# Altium PCB MiniClock.PcbDoc
Units mil, origin at the board's own origin, x right, y up, seen from the top; angles counter-clockwise.
Board outline 3937.01 x 1125.98 mil, 4 copper layers (Top Layer, Internal Plane 1, Internal Plane 2, Bottom Layer), stack 18.2 mil thick; 63 components, 85 nets, 292 pads, 146 vias.
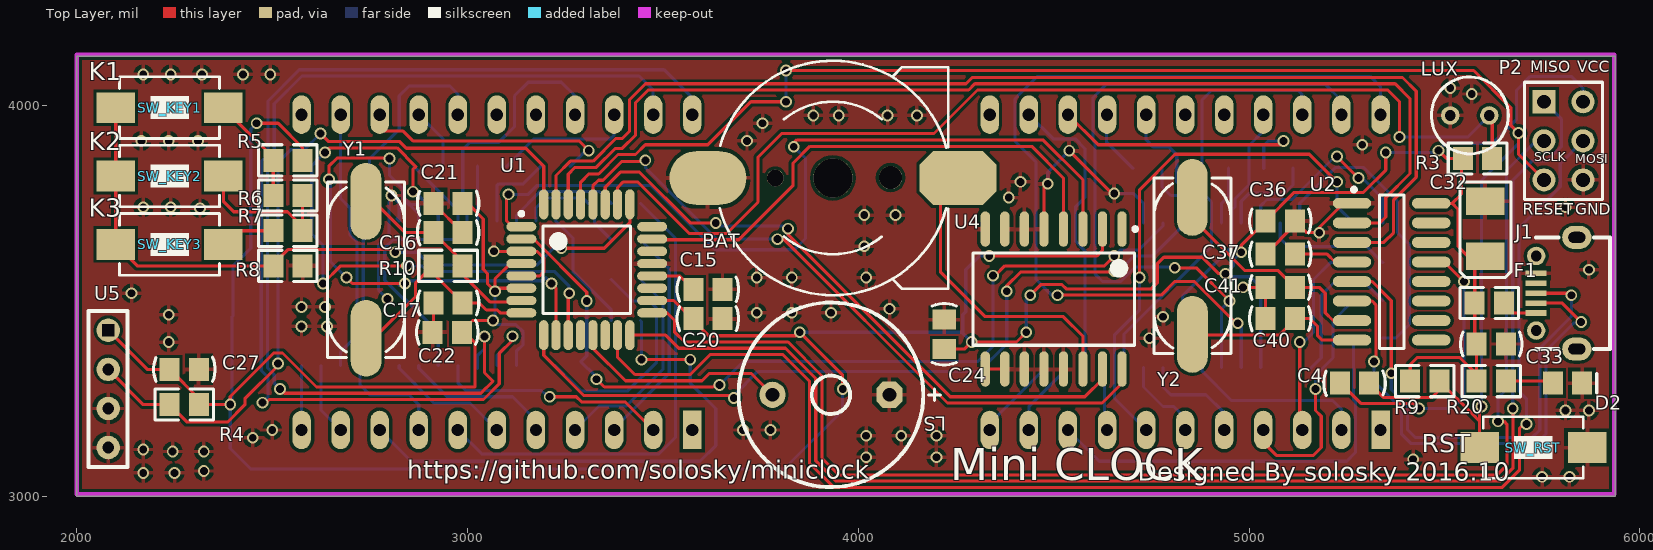
[diagram p0: Top Layer view]
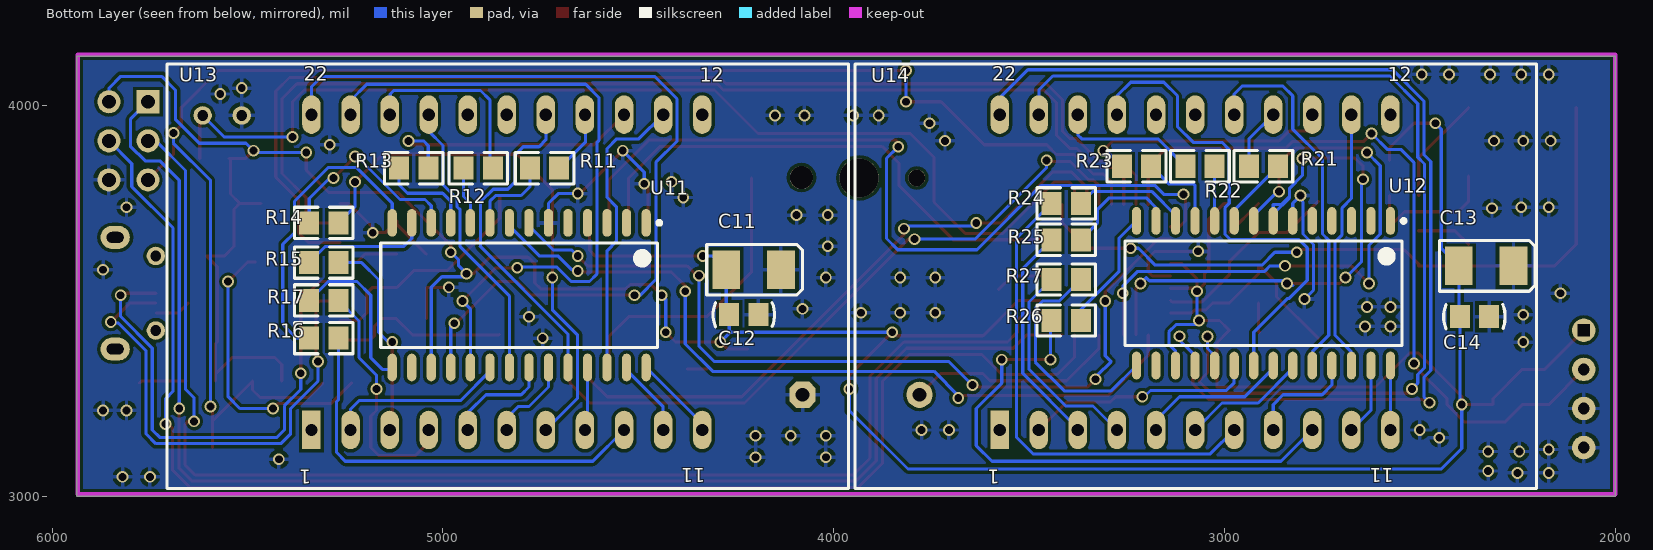
[diagram p1: Bottom Layer view, seen from below]
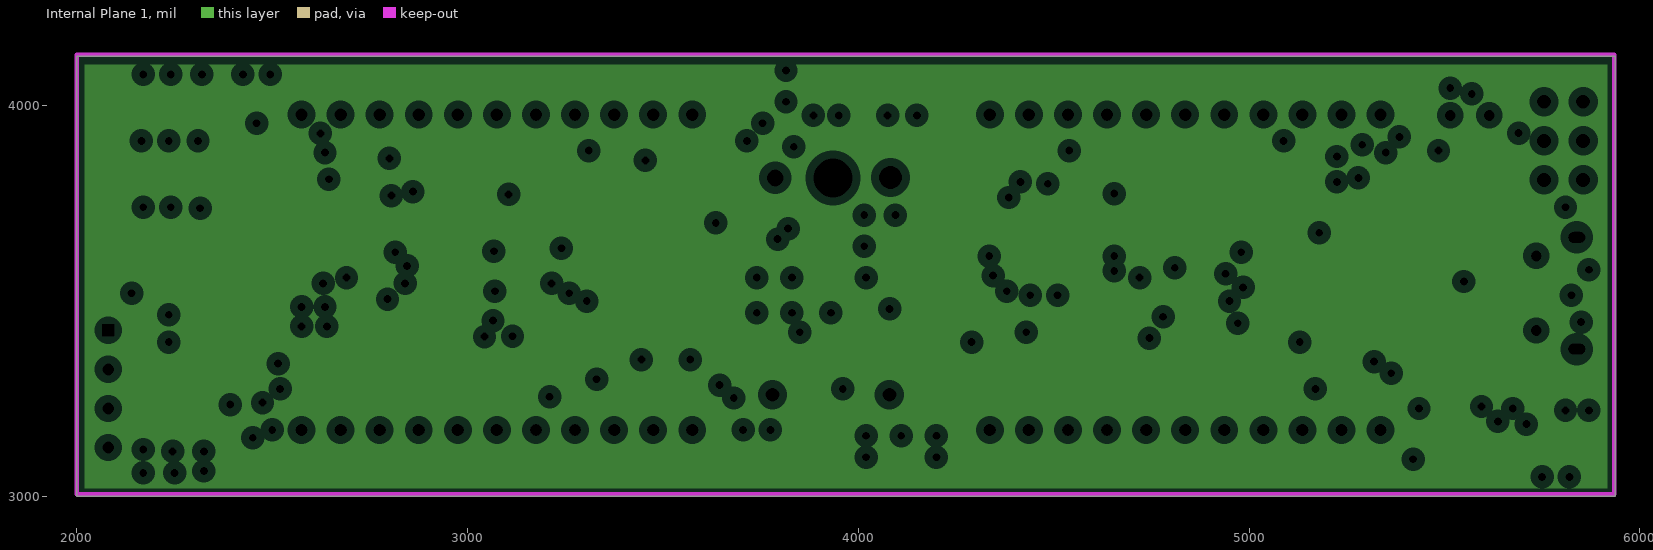
[diagram p2: Internal Plane 1, clearances drawn from the general rule]
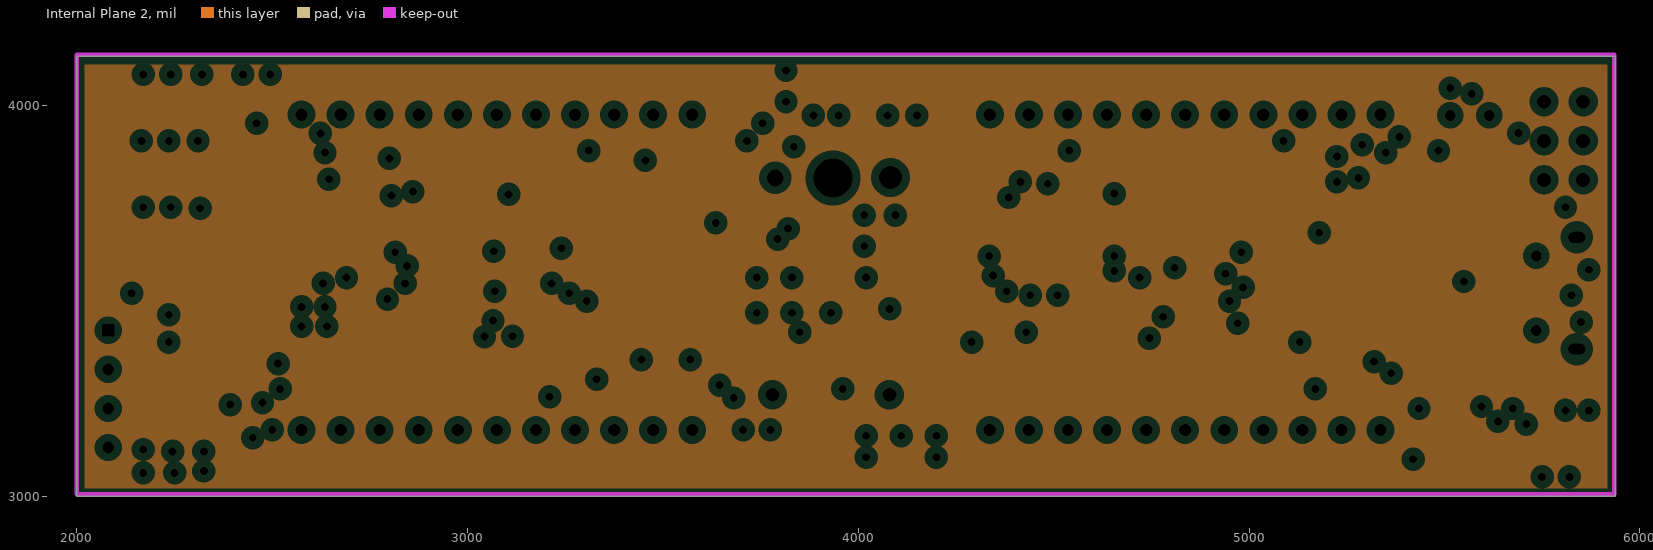
[diagram p3: Internal Plane 2, clearances drawn from the general rule]
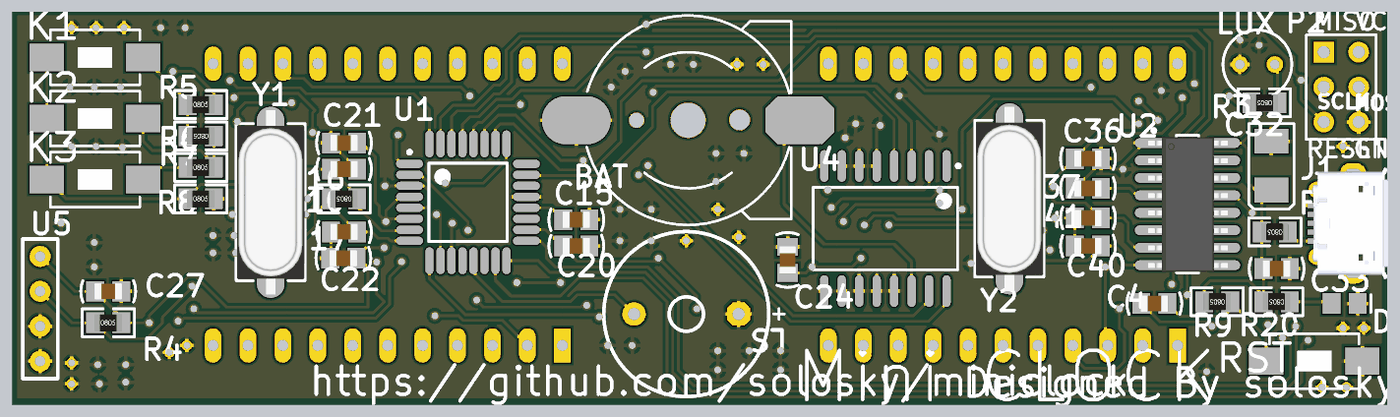
[diagram p4: 3D render of the assembled board from above, using the file's embedded part models]
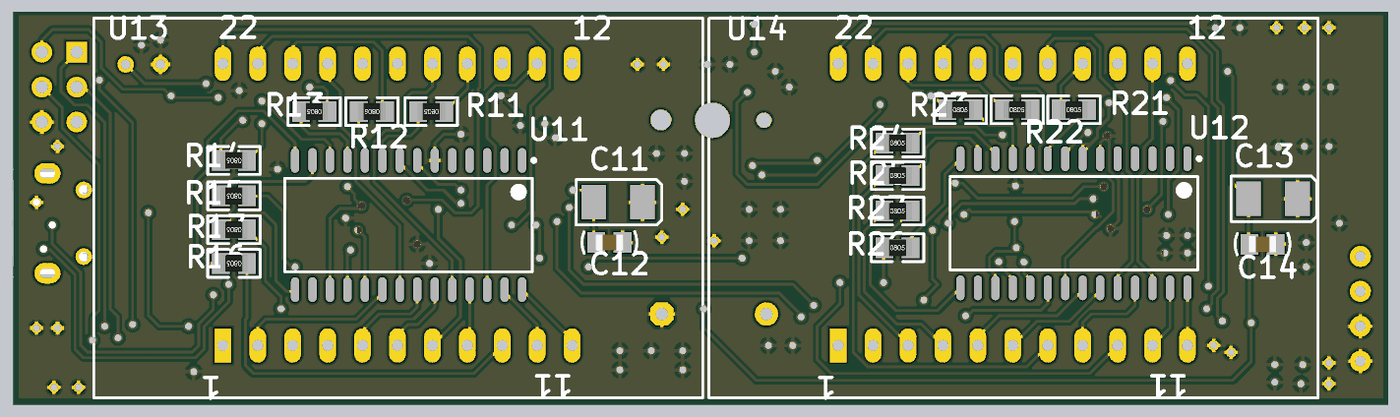
[diagram p5: 3D render of the assembled board from below, using the file's embedded part models]

## Layer stack, top to bottom
Top Solder: solder mask 0.4, Solder Resist, Dk 3.5
Top Layer: signal copper 1.4
Internal Plane 1: plane copper 1.4
Internal Plane 2: plane copper 1.4
Dielectric 1: dielectric 12.6, FR-4, Dk 4.8
Bottom Layer: signal copper 1.4
Bottom Solder: solder mask 0.4, Solder Resist, Dk 3.5

## Board outline
2000,3000 5937.01,3000 5937.01,4125.98 2000,4125.98

## Design rules (kind name [scope] priority, off if disabled: settings)
Clearance [All] p1: gap=8 except(6: SMDPad-SMDPad)
MinimumSolderMaskSliver [All] p1: minsoldermaskwidth=4
PlaneClearance [All] p1: clearance=20
PlaneConnect [All] p1: planeconnectstyle=Relief reliefexpansion=20 reliefentries=4 reliefconductorwidth=10 reliefairgap=10
PolygonConnect [All] p1: connectstyle=Relief reliefconductorwidth=10 reliefentries=4 polygonreliefangle="90 Angle" airgapwidth=10
RoutingVias [All] p1: holewidth=20 width=30 viastyle="Through Hole" minholewidth=20 minwidth=30 maxholewidth=20 maxwidth=30
SilkToSilkClearance [All] p1: silktosilkclearance=6
SilkToSolderMaskClearance [IsPad] p1: minsilkscreentomaskgap=4 clearancetoexposedcopper=TRUE
SolderMaskExpansion [All] p1: expansion=4
UnpouredPolygon [All] p1: allowunpoured=FALSE
Width [All] p1: maxlimit=8 minlimit=8 preferedwidth=8
24 further rules are at their usual default settings.

## Classes and differential pairs
component class MiniClock: BAT C4 C15 C16 C17 C20 C21 C22 C24 C27 C32 C33 C36 C37 C40 C41 D2 F1 J1 LS LUX P2 R3 R4 R5 R6 R7 R8 R9 R10 R20 SW_KEY1 SW_KEY2 SW_KEY3 SW_RST U1 U2 U4 U5 Y1 Y2
component class LedDriver: C11 C12 C13 C14 R11 R12 R13 R14 R15 R16 R17 R21 R22 R23 R24 R25 R26 R27 U11 U12 U13 U14

## Components (designator, comment, footprint, x,y, rotation, side; value= is the part's Value field where it differs from the comment)
BAT "CR1220" CR1220 3935,3815 r90 top
C4 "Cap" C-0805 5270,3290 r180 top
C11 "Cap" CAP-3528 4205,3580 r0 bottom
C12 "Cap" C-0805 4230,3465 r0 bottom
C13 "Cap" CAP-3528 2330,3590 r0 bottom
C14 "Cap" C-0805 2360,3460 r0 bottom
C15 "Cap" C-0805 3615,3530 r180 top
C16 "Cap" C-0805 2950,3675 r180 top
C17 "Cap" C-0805 2950,3495 r0 top
C20 "Cap" C-0805 3615,3455 r180 top
C21 "Cap" C-0805 2950,3750 r0 top
C22 "Cap" C-0805 2948.19,3420 r0 top
C24 "Cap" C-0805 4220,3415 r270 top
C27 "Cap" C-0805 2275,3325 r180 top
C32 "Cap Pol2" CAP-3528 5605,3685 r90 top
C33 "Cap" C-0805 5620,3390 r0 top
C36 "Cap" C-0805 5080,3705 r180 top
C37 "Cap" C-0805 5080,3620 r0 top
C40 "Cap" C-0805 5080,3455 r0 top
C41 "Cap" C-0805 5080,3535 r0 top
D2 "PW_LED" LED-0805 5815,3290 r0 top
F1 "Fuse 1" 0805-1 5615,3495 r180 top
J1 "USB_M" USB_MICRO_5S_B 5735,3520 r270 top
LS "Buzzer" BEEP-S 3930,3260 r180 top locked
LUX "LUX" AX_2.54 5615,3975 r180 top
P2 "ISP" HDR2X3 5755,4010 r270 top
R3 "Res2" 0805-1 5585,3865 r180 top
R4 "Res2" 0805-1 2275,3235 r0 top
R5 "Res2" 0805-1 2540,3860 r0 top
R6 "Res2" 0805-1 2540,3770 r180 top
R7 "Res2" 0805-1 2540,3680 r0 top
R8 "Res2" 0805-1 2540,3590 r0 top
R9 "Res2" 0805-1 5450,3295 r180 top
R10 "Res2" 0805-1 2950,3590 r180 top
R11 "Res2" 0805-1 4740,3840 r0 bottom
R12 "Res2" 0805-1 4910,3840 r0 bottom
R13 "Res2" 0805-1 5075,3840 r0 bottom
R14 "Res2" 0805-1 5305,3700 r0 bottom
R15 "Res2" 0805-1 5305,3598.33 r0 bottom
R16 "Res2" 0805-1 5305,3405 r0 bottom
R17 "Res2" 0805-1 5305,3501.67 r0 bottom
R20 "Res2" 0805-1 5620,3295 r180 top
R21 "Res2" 0805-1 2900,3845 r180 bottom
R22 "Res2" 0805-1 3062.5,3845 r180 bottom
R23 "Res2" 0805-1 3225,3845 r180 bottom
R24 "Res2" 0805-1 3405,3750 r180 bottom
R25 "Res2" 0805-1 3405,3656.67 r180 bottom
R26 "Res2" 0805-1 3405,3450 r180 bottom
R27 "Res2" 0805-1 3405,3555 r180 bottom
SW_KEY1 "SW-PB" SW_PB2_A1 2235,3995 r270 top
SW_KEY2 "SW-PB" SW_PB2_A1 2235,3820 r270 top
SW_KEY3 "SW-PB" SW_PB2_A1 2235,3645 r270 top
SW_RST "SW-PB" SW_PB2_A1 5730,3125 r90 top locked
U1 "ATmega328L-8AC" 32A_M 3305,3580 r0 top locked
U2 "CH340G" SOIC-16 5365,3575 r0 top
U4 "DS3231" SOIC-16W 4500,3505 r270 top
U5 "DHT11" DHTxx_simple 2030,3475 r270 top
U11 "TM1640" SOIC28W 4805,3515 r270 bottom
U12 "TM1640" SOIC28W 2900,3520 r270 bottom locked
U13 "LED_ARRAY_2" DIP22_LEDARR 5336.61,3170 r90 bottom locked
U14 "LED_ARRAY_2" DIP22_LEDARR 3575,3170 r90 bottom locked
Y1 "16MHz" X-SM49 2740,3580 r90 top
Y2 "12MHz" X-SM49 4855,3590 r90 top

## Footprints (in the part's own frame and the unit in brackets; to place one, negate y for a bottom-side part, rotate by r counter-clockwise, add the part's x,y. Pads: shape width x height; smd on the part's side, far side on the other; paste and mask are expansions set on the pad)
32A_M [mm] "Thin QFP, 32-Leads, Body 7x7mm, Pitch 0.8mm, IPC Low Density"
  oval 1.95x0.6 smd: 1(-4.25,2.8) 2(-4.25,2) 3(-4.25,1.2) 4(-4.25,0.4) 5(-4.25,-0.4) 6(-4.25,-1.2) 7(-4.25,-2) 8(-4.25,-2.8) 17(4.25,-2.8) 18(4.25,-2) 19(4.25,-1.2) 20(4.25,-0.4) 21(4.25,0.4) 22(4.25,1.2) 23(4.25,2) 24(4.25,2.8)
  oval 0.6x1.95 smd: 9(-2.8,-4.25) 10(-2,-4.25) 11(-1.2,-4.25) 12(-0.4,-4.25) 13(0.4,-4.25) 14(1.2,-4.25) 15(2,-4.25) 16(2.8,-4.25) 25(2.8,4.25) 26(2,4.25) 27(1.2,4.25) 28(0.4,4.25) 29(-0.4,4.25) 30(-1.2,4.25) 31(-2,4.25) 32(-2.8,4.25)
  silkscreen extent -4.37,-2.85 2.85,3.77, body extent -3.5,-3.5 3.5,3.5, height 1.2
0805-1 [mm] "0805带丝印"
  rect 1.3x1.5 smd: 1(-0.95,0) 2(0.95,0)
  silkscreen extent -1.91,-1.02 1.91,1.02, body extent -1,-0.62 1,0.63, height 0.5
AX_2.54 [mm]
  round 1.2 hole 0.7: 1(0,0) 2(2.54,0)
  silkscreen extent -1.23,-2.5 3.77,2.5
BEEP-S [mm] "有源蜂鸣器"
  oct 1.7x1.7 hole 0.9: 1(-3.8,0)
  round 1.7 hole 0.9: 2(3.8,0)
  silkscreen extent -7.11,-6 6,6
C-0805 [mm] "贴片电容"
  rect 1.3x1.5 smd: 1(-0.95,0) 2(0.95,0)
  silkscreen extent -2,-0.79 2,0.79, body extent -1,-0.6 1,0.6, height 0.95
CAP-3528 [mm] "钽电容"
  rect 1.8x2.5 smd: 1(-1.778,0) 2(1.778,0)
  silkscreen extent -3.17,-1.65 3.05,1.65, body extent -1.91,-1.4 1.91,1.4, height 1.1
CR1220 [mm] "钮扣电池"
  round 1.1 hole 1.1: 0(0,3.75)
  round 2.54 hole 2.54: 0(0,0)
  round 1.5 hole 1.5: 0(0.025,-3.75)
  oct 3.5x5 smd: 1(0,-8.128)
  oval 3.5x5 smd: 2(0,8.128)
  silkscreen extent -7.62,-7.5 7.62,7.36
DHTxx_simple [mil]
  round 60 hole 30 square: 1(50,50)
  round 60 hole 30: 2(150,50) 3(250,50) 4(350,50)
  silkscreen extent 0,0 400,100
DIP22_LEDARR [mm]
  rect 2.5x1.2 hole 0.8: 1(0,0)
  oval 2.5x1.2 hole 0.8: 2(0,-2.54) 3(0,-5.08) 4(0,-7.62) 5(0,-10.16) 6(0,-12.7) 7(0,-15.24) 8(0,-17.78) 9(0,-20.32) 10(0,-22.86) 11(0,-25.4) 12(20.5,-25.4) 13(20.5,-22.86) 14(20.5,-20.32) 15(20.5,-17.78) 16(20.5,-15.24) 17(20.5,-12.7) 18(20.5,-10.16) 19(20.5,-7.62) 20(20.5,-5.08) 21(20.5,-2.54) 22(20.5,0)
  silkscreen extent -3.8,-34.9 23.8,9.4
HDR2X3 [mm] "Connector; Header; 3x2 Position"
  rect 1.5x1.5 hole 0.9: 1(0,0)
  round 1.5 hole 0.9: 2(0,2.54) 3(2.54,0) 4(2.54,2.54) 5(5.08,0) 6(5.08,2.54)
  silkscreen extent -1.27,-1.27 6.35,3.81
LED-0805 [mm] "贴片LED"
  rect 1.3x1.5 smd: 1(-0.95,0) 2(0.95,0)
  silkscreen extent 1.91,-0.64 1.91,0.64
SOIC28W [mm] "SOIC, 28-Leads, Body 17.93x7.52mm, Pitch 1.27mm, IPC Medium Density"
  oval 1.8x0.6 smd: 1(-4.7,8.255) 2(-4.7,6.985) 3(-4.7,5.715) 4(-4.7,4.445) 5(-4.7,3.175) 6(-4.7,1.905) 7(-4.7,0.635) 8(-4.7,-0.635) 9(-4.7,-1.905) 10(-4.7,-3.175) 11(-4.7,-4.445) 12(-4.7,-5.715) 13(-4.7,-6.985) 14(-4.7,-8.255) 15(4.7,-8.255) 16(4.7,-6.985) 17(4.7,-5.715) 18(4.7,-4.445) 19(4.7,-3.175) 20(4.7,-1.905) 21(4.7,-0.635) 22(4.7,0.635) 23(4.7,1.905) 24(4.7,3.175) 25(4.7,4.445) 26(4.7,5.715) 27(4.7,6.985) 28(4.7,8.255)
  silkscreen extent -4.82,-9 3.4,9.23, body extent -3.8,-9 3.8,9, height 2.44
SOIC-16 [mm]
  oval 2.5x0.7 smd: 1(-2.577,4.445) 2(-2.577,3.175) 3(-2.577,1.905) 4(-2.577,0.635) 5(-2.577,-0.635) 6(-2.577,-1.905) 7(-2.577,-3.175) 8(-2.577,-4.445) 9(2.577,-4.445) 10(2.577,-3.175) 11(2.577,-1.905) 12(2.577,-0.635) 13(2.577,0.635) 14(2.577,1.905) 15(2.577,3.175) 16(2.577,4.445)
  silkscreen extent -2.57,-5 0.8,5.47, body extent -2.88,-4.92 2.92,4.88, height 1.75
SOIC-16W [mm] "SOIC"
  oval 2.3x0.6 smd: 1(-4.55,4.445) 2(-4.55,3.175) 3(-4.55,1.905) 4(-4.55,0.635) 5(-4.55,-0.635) 6(-4.55,-1.905) 7(-4.55,-3.175) 8(-4.55,-4.445) 9(4.55,-4.445) 10(4.55,-3.175) 11(4.55,-1.905) 12(4.55,-0.635) 13(4.55,0.635) 14(4.55,1.905) 15(4.55,3.175) 16(4.55,4.445)
  silkscreen extent -4.67,-5.25 3,5.42, body extent -3.75,-5.15 3.75,5.15, height 2.65
SW_PB2_A1 [mm]
  rect 2x2.5 smd: 1(0,3.556) 2(0,-3.444)
  silkscreen extent -2,-3.19 2,3.31, body extent -1.93,-3.94 1.92,3.95, height 2.5
USB_MICRO_5S_B [mil] "USB Micro SMT 5S B"
  rect 15x54 smd: 1(51,0) 2(25.5,0) 3(0,0) 4(-25.5,0) 5(-51,0)
  oval 59.06x74.8 hole 27.56 slot 43.31 at 90 deg: 6(-143,104) 7(143,104)
  round 47.24 hole 27.5: 8(95.5,0) 9(-95.5,0)
  silkscreen extent -143,0 143,189, body extent -161,-9 161,204, height 105
X-SM49 [mm]
  oval 5x2 smd: 1(4.45,0.004) 2(-4.45,-0.004)
  silkscreen extent -5.7,-2.5 5.72,2.5, body extent -6.7,-2.46 6.7,2.44, height 4

## Part data
BAT: library part Battery, "Multicell Battery"
C4 C11 C12 C13 C14 C15 C16 C17 C20 C21 C22 C24 C27 C33 C36 C37 C40 C41: "Capacitor"
C32: "Polarized Capacitor (Axial)"
D2: library part LED2, "Typical RED, GREEN, YELLOW, AMBER GaAs LED"
F1: "Fuse"
J1: "Micro/Mini USB"
LS: "Magnetic Transducer Buzzer"
P2: library part "Header 3X2", "Header, 3-Pin, Dual row"
R3 R4 R5 R6 R7 R8 R9 R10 R11 R12 R13 R14 R15 R16 R17 R20 R21 R22 R23 R24 R25 R26 R27: "Resistor"
SW_KEY1 SW_KEY2 SW_KEY3 SW_RST: "Switch"
U1: library part ATmega8L-8AC, "8-Bit AVR Microcontroller with 8K Bytes of In-System Programmable Flash Memory"
U5: library part DHT22
U11 U12: "8 段×16 位LED驱动芯片"
Y1 Y2: library part XTAL, "Crystal Oscillator"

## Via types
v1: diameter 30, hole 20, Top Layer to Bottom Layer, tented both sides, 128 vias
v2: diameter 30, hole 20, Top Layer to Bottom Layer, 18 vias

## Nets (pads, with @x,y where several pads share a name; then routed paths per layer and width w, separated by ;. In a path a pad name is that pad's centre, name@x,y a point inside that pad or via, vN(x,y) a via of type N, cw(c..) or ccw(c..) an arc to the next point about the centre after c; other vN are vias at no path point)
BUZZER: LS.2 U1.13 | length 558.2
  Top Layer w8: U1.13 3320.75,3379.25 3404,3296 3600,3296 3619,3315 3725.39,3315 LS.2
C11: R11.1 U13.15 | length 165.1
  Bottom Layer w8: U13.15@4635,3977.09 4635,3907.6 R11.1
C12: R12.1 U13.20 | length 499.6
  Bottom Layer w8: R12.1 4880,3847.4 4880,4015 4904,4039 5126,4039 5135,4030 U13.20@5135,3977.09
C13: R13.1 U13.14 | length 701.4
  Top Layer w8: U13.14 4613.7,3900 5078.65,3900 v1(5088.4,3909.75)
  Bottom Layer w8: R13.1 5037.6,3897.6 5050,3910 5050.25,3909.75 v1(5088.4,3909.75)
C14: R14.1 U13.7 | length 1369.2
  Top Layer w8: v1(4720,3560) 4720,3785 4810.62,3875.62 5154.38,3875.62 v1(5225,3805)
  Bottom Layer w8: v1(4720,3560) 4720,3477.63 4656.19,3413.82 4656.19,3250.43 U13.7 ; v1(5225,3805) 5225,3742.6 R14.1
C15: R15.1 U13.3 | length 528.6
  Top Layer w8: v1(5130,3395) 5130,3176.61 U13.3
  Bottom Layer w8: v1(5130,3395) 5140,3395 5165,3420 5165,3555 5208.33,3598.33 R15.1
C16: R16.1 U13.9 | length 1072.7
  Bottom Layer w8: U13.9 4616.61,3090 5250,3090 5272.24,3112.24 5272.24,3242.76 5267.6,3247.4 R16.1
C17: R17.1 U13.4 | length 632
  Top Layer w8: U13.4 5036.61,3138.39 5070,3105 5165,3105 5185,3125 5185,3205 5170,3220 v1(5170,3275)
  Bottom Layer w8: U13.4 U13.4@5036.61,3176.61 ; v1(5170,3275) 5170,3310 5215,3355 5215,3449.07 R17.1
C21: R21.1 U14.15 | length 157.9
  Bottom Layer w8: U14.15 2937.4,3914.69 R21.1
C22: R22.1 U14.20 | length 360.3
  Bottom Layer w8: R22.1 3169.9,3915 3365,3915 3375,3925 U14.20
C23: R23.1 U14.14 | length 656.1
  Top Layer w8: U14.14 2775,3945 2785,3935 2835,3935 2860,3910 3285,3910 v1(3310,3885)
  Bottom Layer w8: R23.1 3302.4,3885 v1(3310,3885)
C24: R24.1 U14.7 | length 1235.9
  Bottom Layer w8: U14.7 3036.21,3108.79 3489.76,3108.79 3532,3151.03 3532,3660.4 R24.1
C25: R25.1 U14.3 | length 575.6
  Bottom Layer w8: U14.3 3375,3173.77 3516,3314.77 3516,3583.07 R25.1
C26: R26.1 U14.9 | length 1382.7
  Top Layer w8: v1(3445,3350) v1(3570,3350)
  Bottom Layer w8: U14.9 2855,3090 3595,3090 3635,3130 3635,3225 3570,3290 v1(3570,3350) ; R26.1 3445,3447.4 v1(3445,3350)
C27: R27.1 U14.4 | length 543.1
  Bottom Layer w8: U14.4 3336.21,3231.21 3406.21,3231.21 3500,3325 3500,3497.4 R27.1
DS_INT: U1.1 U4.3 | length 2136.6
  Top Layer w8: v1(3104.82,3773) 3105,3773.18 3105,3775 3100,3770 3100,3705 3114.76,3690.24 U1.1 ; v1(3835,3895) 3835,3905 3842.63,3912.63 4472.37,3912.63 4575,3810 U4.3
  Bottom Layer w8: v1(3104.82,3773) 3155.37,3773 3178.37,3796 3468.49,3796 3633.08,3631.41 3836.41,3631.41 3865,3660 3865,3865 v1(3835,3895)
DS_RST#: U1.23 U4.4 | length 1350.3
  Top Layer w8: U1.23 3474.06,3657 3694.26,3657 3833.25,3795.99 3833.25,3853.25 3875.9,3895.9 4444.1,3895.9 4525,3815 U4.4
DTR#: C4.2 U2.13 | length 742.5
  Top Layer w8: C4.2 5235,3290 5287.53,3237.47 5422.53,3237.47 v1(5435,3225) ; U2.13@5480,3600 5500,3600 v1(5550,3550)
  Bottom Layer w8: v1(5435,3225) 5520,3225 5550,3255 v1(5550,3550)
GND: BAT.2 C11.1 C12.1 C13.1 C14.1 C15.1 C16.1 C17.1 C20.1 C21.1 C22.1 C24.1 C27.1 C32.2 C33.2 C36.1 C37.1 C40.1 C41.1 D2.2 J1.5 LS.1 LUX.2 P2.6 R8.2 SW_RST.2 U1.3 U1.5 U1.21 U2.1 U4.5 U4.6 U4.7 U4.8 U4.9 U4.10 U4.11 U4.12 U4.13 U5.3 U5.4 U11.6 U12.6 | length 1797.6
  Top Layer w8: C22.1 2912.6,3421.81 C17.1 ; C21.1 2912.6,3749.8 C16.1 ; v1(3067.24,3627.24) U1.3 3177.76,3627.24 3195,3610 3195,3575 3184.25,3564.25 U1.5 ; U4.9 U4.10 ; U4.5 4475,3790 v1(4485,3800) ; v1(4540,3885) 4650,3775 v1(4655,3775) ; v1(4985,3535) C41.1 C40.1 ; C37.1 5117.4,3694.8 C36.1 5147.4,3675 v1(5180,3675) 5180,3688.35 5241.65,3750 U2.1
  Bottom Layer w8: v1(2795,3505) 2772,3528 2772,3644.74 2798.81,3671.55 2798.81,3753.81 2810,3765 2825,3750 U12.6 U12.6@2819.32,3710.72 ; v1(4485,3800) 4485,3830 v1(4540,3885) ; v1(4655,3775) 4705,3775 4730,3750 U11.6
  other v1: 2250,3060 2325,3065 5420,3095 4020,3100 4200,3100 2245,3115 2325,3115 4020,3155 4110,3155 4200,3155 3705,3170 3775,3170 2235,3395 4745,3405 2575,3435 2640,3435 4780,3460 2235,3465 3740,3470 3830,3470 2575,3485 2635,3485 2140,3520 3740,3560 3830,3560 4015,3640 4015,3720 4095,3720 2315.21,3737.5 2170,3740 2240,3740 4385,3765 2805,3770 4415,3805 5290,3900 2165,3910 2235,3910 2310,3910 3715,3910 3755,3955 3885,3975 3950,3975 5570,4030 5515,4045 2425,4080 2495,4080
  other v2: 5750,3050 5820,3050 2170,3060 2170,3120 2450,3150 2500,3170 5810,3220 5870,3220 3930,3470 4080,3480 4020,3560 5870,3580 5810,3740 4075,3975 4150,3975 2170,4080 2240,4080 2320,4080
KEY: R8.1 SW_KEY1.2 SW_KEY2.2 SW_KEY3.2 U1.25 | length 1829.6
  Top Layer w8: SW_KEY1.2 SW_KEY2.2 SW_KEY3.2 2154.41,3590 R8.1 2502.6,3594.13 2540,3631.53 2821.53,3631.53 v1(2815,3625) ; v1(3240,3635) 3350,3635 3415.24,3700.24 U1.25
  Bottom Layer w8: v1(2815,3625) 2870.81,3625 2903.81,3592 3177,3592 3220,3635 v1(3240,3635)
LUX: LUX.1 R3.1 U1.26 | length 2792.5
  Top Layer w8: U1.26 3383.74,3790 3398.74,3805 3435,3805 3567,3673 3663,3673 3743.18,3753.18 3743.18,3868.18 3803.63,3928.63 4193.63,3928.63 4305,4040 5355,4040 5385,4010 v1(5385,3920) ; LUX.1 5622.4,3967.6 R3.1
  Bottom Layer w8: v1(5385,3920) 5560,3920 LUX.1
MISO: P2.1 U1.16 | length 3582.3
  Top Layer w8: U1.16 3506.78,3412.68 3540.46,3379 3813.63,3379 3891,3301.63 3891,3091.37 3943.37,3039 5641.63,3039 5676,3073.37 5676,3224 v1(5675,3225)
  Bottom Layer w8: v1(5675,3225) 5675,3808.73 5725,3858.73 5762.46,3858.73 5800,3896.27 5800,3965 P2.1
MOSI: P2.4 U1.15 | length 3618.1
  Top Layer w8: U1.15 3383.74,3356.26 3428,3312 3570.18,3312 3621.18,3363 3807,3363 3875,3295 3875,3084.75 3936.75,3023 5648.25,3023 5692,3066.75 5692,3173.69 5705,3186.69 5706.69,3185 v1(5710,3185)
  Bottom Layer w8: v1(5710,3185) 5710,3250 5691,3269 5691,3687.27 5796.53,3792.8 5796.53,3851.53 P2.4
NetBAT_1: BAT.1 U4.14 | length 757.5
  Top Layer w8: BAT.1@4210,3815 4210,3575 4325,3460 4525,3460 4575,3410 U4.14
NetC15_2: C15.2 U1.20 | length 119.5
  Top Layer w8: U1.20 3543.35,3564.25 C15.2
NetC16_2: C16.2 R10.1 U1.7 Y1.1 | length 504.8
  Top Layer w8: Y1.1@2759.83,3755.2 2840.03,3675 C16.2 2987.4,3600.2 R10.1 2987.4,3567.6 3057,3498 3134.42,3498 U1.7
NetC17_2: C17.2 R10.2 U1.8 Y1.2 | length 536.4
  Top Layer w8: Y1.2@2760.17,3404.8 2867,3511.63 2867,3546.63 2910.37,3590 R10.2 2912.6,3569.8 C17.2 3030,3495 3048,3477 3076.18,3477 3083.42,3469.76 U1.8
NetC37_2: C37.2 U2.4 | length 154.4
  Top Layer w8: C37.2 5200,3620 5220,3600 U2.4
NetC40_2: C40.2 U2.8 Y2.2 | length 462.8
  Top Layer w8: Y2.2 4856.5,3413.47 5078.16,3413.47 5119.69,3455 5122.4,3455 5156.2,3455 5175,3436.2 5175,3412.4 5187.4,3400 U2.8
NetC41_2: C41.2 U2.7 Y2.1 | length 599.7
  Top Layer w8: Y2.1 4854.83,3711.99 4988.34,3578.47 5073.93,3578.47 C41.2 5180,3535 5195,3520 5195,3470 5215,3450 U2.7
NetD2_1: D2.1 R20.1 | length 122.3
  Top Layer w8: R20.1 5772.6,3295 D2.1
NetF1_1: F1.1 J1.1 | length 93.4
  Top Layer w8: F1.1 5678.4,3469 J1.1
NetR5_1: R5.1 R6.2 SW_KEY1.1 | length 277.9
  Top Layer w8: SW_KEY1.1 2502.6,3867.4 R6.2
NetR6_1: R6.1 R7.2 SW_KEY2.1 | length 374.3
  Top Layer w8: SW_KEY2.1 2375,3755 2401.53,3728.47 2538.93,3728.47 2577.4,3690 R6.1
NetR7_1: R7.1 SW_KEY3.1 | length 142.1
  Top Layer w8: SW_KEY3.1 2410,3680 R7.1
NetR11_2: R11.2 U11.9 | length 220.5
  Bottom Layer w8: R11.2 4777.4,3792.6 4800,3770 4865,3770 4880,3755 U11.9
NetR12_2: R12.2 U11.10 | length 147.2
  Bottom Layer w8: U11.10 4930,3750.2 4947.4,3767.6 R12.2
NetR13_2: R13.2 U11.11 | length 247.5
  Bottom Layer w8: U11.11 4980,3755 5001,3776 5091,3776 5112.4,3797.4 R13.2
NetR14_2: R14.2 U11.12 | length 515.6
  Top Layer w8: v1(5225,3870) v1(5280,3815)
  Bottom Layer w8: U11.12 5030,3744 5046,3760 5110,3760 5220,3870 v1(5225,3870) ; v1(5280,3815) 5290,3815 5342.4,3762.6 R14.2
NetR15_2: R15.2 U11.13 | length 328
  Bottom Layer w8: U11.13 5080,3660 5100,3640 5300.74,3640 R15.2
NetR16_2: R16.2 U11.14 | length 783.6
  Bottom Layer w8: U11.14 5130,3750 5222,3842 5293,3842 5379.99,3755.01 5379.99,3675.01 5410,3645 5410,3440 5375,3405 R16.2
NetR17_2: R17.2 U11.15 | length 421.4
  Bottom Layer w8: U11.15 5134.96,3325 5155,3325 5185,3355 5185,3515 5220,3550 5294.07,3550 R17.2
NetR21_2: R21.2 U12.9 | length 186.5
  Bottom Layer w8: R21.2 2975,3732.6 U12.9
NetR22_2: R22.2 U12.10 | length 140
  Bottom Layer w8: U12.10 3025.1,3705.14 R22.2
NetR23_2: R23.2 U12.11 | length 223.3
  Bottom Layer w8: U12.11 3075,3795 3080,3800 3142.6,3800 R23.2
NetR24_2: R24.2 U12.12 | length 294.8
  Bottom Layer w8: U12.12 3125,3720 3185,3780 3337.6,3780 R24.2
NetR25_2: R25.2 U12.13 | length 301.7
  Bottom Layer w8: U12.13 3175,3739 3200,3764 3295,3764 3325,3734 3325,3699.26 R25.2
NetR26_2: R26.2 U12.14 | length 314.1
  Bottom Layer w8: U12.14 3270,3660.04 3270,3575 3367.6,3477.4 R26.2
NetR27_2: R27.2 U12.15 | length 600.4
  Bottom Layer w8: U12.15 3289.96,3270 3410,3270 3483.69,3343.69 3483.69,3481.31 3465,3500 3422.6,3500 R27.2
R101: U11.18 U13.22 | length 2235
  Top Layer w8: v1(4510,3515) 4775,3515 4810,3550 4860,3550 4966.67,3443.33 v1(4971.03,3443.33)
  Bottom Layer w8: v1(4510,3515) 4495,3515 4455,3555 4455,3855 4400.99,3909.01 4400.99,4017.43 4458.56,4075 5310,4075 5336.61,4048.39 U13.22 ; v1(4971.03,3443.33) 4980,3434.36 U11.18
R102: U11.19 U13.21 | length 1738.9
  Top Layer w8: v1(4810,3585) 4865,3585 v1(4950,3500)
  Bottom Layer w8: v1(4810,3585) 4808,3587 4708.82,3587 4671.82,3550 4655.91,3550 4625,3550 4606.19,3568.81 4606.19,3905.23 4600.99,3910.43 4600.99,4020.99 4635,4055 5195,4055 5236.61,4013.39 U13.21 ; U11.19 4930,3480 v1(4950,3500)
R103: U11.20 U13.2 | length 460
  Bottom Layer w8: U11.20 4880,3320 4955,3245 5215,3245 5236.61,3223.39 U13.2
R104: U11.21 U13.19 | length 732.7
  Bottom Layer w8: U11.21 4830,3513.18 4956.19,3639.37 4956.19,3733.52 4964,3741.34 4964,3761.63 5000.01,3797.64 5000.01,3898.19 5036.61,3934.8 U13.19
R105: U11.22 U13.5 | length 277.6
  Bottom Layer w8: U11.22 4780,3280 4800,3260 4890,3260 4935,3215 4935,3171.61 U13.5
R106: U11.23 U13.6 | length 220.2
  Bottom Layer w8: U11.23 4730,3280 4780,3230 4807.37,3230 4836.61,3200.76 U13.6
R107: U11.24 U13.16 | length 855.8
  Bottom Layer w8: U11.24 4680,3415 4905,3640 4903.81,3641.19 4903.81,3753.82 4871.63,3786 4834,3786 4814.99,3805.01 4814.99,3874.5 4794.49,3895 4754.05,3895 4736.61,3912.43 U13.16
R108: U11.25 U13.8 | length 162.7
  Bottom Layer w8: U11.25 4630,3176.61 U13.8
R109: U11.26 U13.13 | length 759.5
  Bottom Layer w8: U13.13 4498.7,3915 4555.19,3915 4580.19,3890 4580,3889.81 4580,3765 4556.19,3741.19 4556.19,3652.61 4580,3628.8 U11.26
R110: U11.27 U13.10 | length 198.6
  Bottom Layer w8: U13.10 4436.61,3229.28 4530,3322.66 U11.27
R111: U11.28 U13.11 | length 219.4
  Bottom Layer w8: U13.11 4336.61,3186.57 U11.28
R201: U12.18 U14.22 | length 2836.9
  Top Layer w8: v1(2475,3240) 2484,3240 2492,3248 3040.63,3248 3081,3288.37 3081,3366 3115,3400 v1(3115,3410)
  Bottom Layer w8: v1(2475,3240) 2489,3254 2489,3305.19 2472,3322.19 2472,3857.25 2489,3874.25 2489,4011.63 2569.37,4092 3503,4092 3575,4020 U14.22 ; U12.18 3075,3360 3115,3400 v1(3115,3410)
R202: U12.19 U14.21 | length 2601.8
  Top Layer w8: v1(2520,3275) 2531,3264 3034,3264 3065,3295 3043.33,3316.67 v1(3043.33,3408.97)
  Bottom Layer w8: v1(2520,3275) 2505,3290 2505,3311.82 2488,3328.82 2488,3850.63 2505,3867.63 2505,4005 2576,4076 3439,4076 3475,4040 U14.21 ; U12.19@3025,3327.66 U12.19 3025,3360 3043.33,3378.33 v1(3043.33,3408.97)
R203: U12.20 U14.2 | length 601.2
  Top Layer w8: v1(3210,3255) 3278.37,3255 3291.37,3242 3403,3242 U14.2
  Bottom Layer w8: U12.20 2975,3291 2995,3271 3189,3271 3210,3250 v1(3210,3255)
R204: U12.21 U14.19 | length 1274
  Bottom Layer w8: U12.21 2925,3420 2838.99,3506.01 2834.94,3506.01 2788,3552.95 2788,3636.18 2809.42,3657.61 2984.86,3657.61 2998.81,3671.55 2998.81,3738.52 2987.51,3749.83 2987.51,3887.51 3006.12,3906.12 3080,3906.12 3120,3946.12 3120,4025 3155,4060 3240,4060 3275,4025 U14.19
R205: U12.22 U14.5 | length 387.2
  Bottom Layer w8: U12.22 2875,3327.66 2947.66,3255 3115,3255 3175,3195 U14.5
R206: U12.23 U14.6 | length 322.6
  Bottom Layer w8: U12.23 2825,3327.66 2913.66,3239 3006,3239 U14.6
R207: U12.24 U14.16 | length 967.1
  Bottom Layer w8: U12.24 2775,3370 2733,3412 2733,3655.74 2748.81,3671.55 2748.81,3863.81 2825,3940 2825,4025 2850,4050 2955,4050 2975,4030 U14.16
R208: U12.25 U14.8 | length 285.7
  Bottom Layer w8: U12.25 2725,3285 2750,3260 2850,3260 2875,3235 U14.8
R209: U12.26 U14.13 | length 676.9
  Bottom Layer w8: U12.26 2675,3370 2717,3412 2717,3651.81 2698.81,3670 2698.81,3738.52 2675,3762.34 U14.13
R210: U12.27 U14.10 | length 185.7
  Bottom Layer w8: U12.27 2625,3220 U14.10
R211: U12.28 U14.11 | length 165
  Bottom Layer w8: U14.11 U12.28
RESET#: C4.1 P2.5 R9.1 SW_RST.1 U1.29 | length 4079.5
  Top Layer w8: U1.29 3289.25,3804.25 3310,3825 3335.25,3825 3385.13,3874.87 3429.87,3874.87 3455,3900 3615,3900 3725,4010 v1(3815,4010) ; v1(3815,4090) 5575,4090 5670,3995 5670,3950 v1(5690,3930) 5690,3875 P2.5 ; C4.1 5343.93,3253.47 5468.47,3253.47 5487.4,3272.4 R9.1 5572.4,3210 5590,3192.4 ; SW_RST.1 5590,3192.4 ; v1(5595,3230) 5590,3225 5590,3192.4
  Bottom Layer w8: v1(3815,4010) v1(3815,4090) ; v1(5595,3230) 5595,3809.01 5690,3904.01 v1(5690,3930)
RXD0: U1.30 U2.2 | length 2813.2
  Top Layer w8: U1.30 3257.76,3824.76 3275,3842 3329.63,3842 3378.5,3890.87 3395.87,3890.87 3430,3925 3430,4008.05 3461.95,4040 4282.37,4040 4298.37,4056 5374,4056 5412,4018 5412,3826.57 5350,3764.57 5350,3715 5335,3700 U2.2
SCL: U1.28 U4.16 | length 1753.6
  Top Layer w8: U1.28 3320.75,3794.75 3335,3809 3346.63,3809 3394.63,3857 3452,3857 v1(3455,3860) ; v1(3793.41,3658.41) 3808.96,3658.41 4228.37,3239 4624,3239 4675,3290 U4.16
  Bottom Layer w8: v1(3455,3860) 3455,3841.82 3638.41,3658.41 v1(3793.41,3658.41)
SCLK: P2.3 U1.17 | length 3420.1
  Top Layer w8: U1.17 3510.24,3469.76 3530,3450 3530,3420 3555,3395 3820.25,3395 3907,3308.25 3907,3098 3950,3055 5635,3055 5660,3080 5660,3185 5653,3192 v1(5637,3192)
  Bottom Layer w8: v1(5637,3192) 5637,3252 5659,3274 5659,3834 5735,3910 P2.3
SDA: U1.27 U4.15 | length 1624.5
  Top Layer w8: U1.27 3352.24,3791.24 3391,3830 3440,3830 3570,3700 v1(3635,3700) ; v1(3820.28,3685.28) 3820.28,3669.72 4235,3255 4580,3255 4625,3300 U4.15
  Bottom Layer w8: v1(3635,3700) 3643.2,3691.8 3813.76,3691.8 v1(3820.28,3685.28)
TM: R4.1 U1.32 U5.2 | length 1923.1
  Top Layer w8: U5.2 2170,3235 R4.1 2282.6,3190 2385.56,3190 2430,3234.44 2430,3250 2515,3335 v1(2515,3340) ; v1(2623.35,3928.94) 2644.29,3908 2826.25,3908 2843.25,3891 3149,3891 3194.76,3845.24 U1.32
  Bottom Layer w8: v1(2515,3340) 2515,3855 2547.5,3887.5 2581.9,3887.5 v1(2623.35,3928.94)
TM_DIN1: U1.2 U11.7 | length 2211.9
  Top Layer w8: U1.2 3168.89,3658.74 3305,3522.63 v1(3305,3500) ; v1(3330,3300) 3350,3280 3628,3280 v1@3635,3287 ; v1(4345,3565) 4350,3565 4375,3590 4630,3590 v1(4655,3615)
  Bottom Layer w8: v1(3305,3500) 3305,3360 3290,3345 3325,3310 3325,3295 v1(3330,3300) ; v1(3645,3285) 3705,3345 4305,3345 4345,3385 v1(4345,3565) ; v1(4655,3615) 4671,3631 4718.26,3631 4780,3692.74 U11.7
TM_DIN2: U1.10 U12.7 | length 1442.4
  Top Layer w8: v1(2645,3811.55) 2645,3845 2665.62,3865.62 2799.38,3865.62 v1(2800,3865) ; v1(2690,3560) 2705,3545 v1(2840,3545) ; v1(3215,3545) 3226.26,3533.74 U1.10
  Bottom Layer w8: v1(2645,3811.55) 2648.81,3807.74 2648.81,3601.19 v1(2690,3560) ; v1(2800,3865) 2800,3821.71 2833.05,3788.66 2833.05,3768.82 ; 2824.29,3539.29 2837,3552 3192,3552 3200,3560 v1(3215,3545) ; v1@2830,3545 v1(2840,3545) ; U12.7 U12.7@2875,3722.63 ; 2833.05,3768.82 2833.05,3764.57 U12.7@2875,3722.63 ; 2833.05,3768.82 2855.16,3746.71 2875,3746.71 U12.7@2875,3722.63
TM_SCLK1: U1.9 U11.8 | length 2016.3
  Top Layer w8: U1.9 3194.76,3361.24 3298,3258 3681,3258 v1(3681,3251.88) ; v1(4380,3525) 4380,3539 4415,3574 4652.18,3574 v1(4655.18,3577)
  Bottom Layer w8: v1(3681,3251.88) 3681,3258 3743,3320 4310,3320 4380,3390 v1(4380,3525) ; v1(4655.18,3577) 4658.18,3580 4670,3580 4705,3615 4752.26,3615 4830,3692.74 U11.8
TM_SCLK2: U1.11 U12.8 | length 1590.8
  Top Layer w8: v1(2630,3545) 2675,3590 v1(2845,3590) ; v1(2635,3880) 2647,3892 2819.62,3892 2865,3846.62 2867.43,3844.15 2860.05,3836.78 v1(2860.05,3780) ; U1.11 3257.76,3522.24 v1(3260,3520)
  Bottom Layer w8: v1(2630,3545) 2630,3642.74 2601.19,3671.55 2601.19,3846.19 v1(2635,3880) ; v1(2845,3590) 2883.18,3590 2897.18,3576 3222.18,3576 3260,3538.18 v1(3260,3520) ; v1(2860.05,3780) 2864.34,3780 2925,3719.34 U12.8
TXD0: U1.31 U2.3 | length 2944.1
  Top Layer w8: U1.31 3226.26,3821.26 3263,3858 3321.18,3858 3379.06,3915.87 3395.87,3915.87 3414,3934 3414,4014.68 3455.32,4056 4275.75,4056 4291.75,4072 5393,4072 5428,4037 5428,3817 5370,3759 5370,3675 5345,3650 U2.3
UD+: J1.3 U2.5 | length 1293.5
  Top Layer w8: U2.5 5315,3550 5364.01,3500.99 v1(5364.01,3315.27) ; J1.3 5820,3520 v1(5825,3515)
  Bottom Layer w8: v1(5364.01,3315.27) 5364.01,3273.62 5406,3231.63 5406,3170 5425,3151 5725,3151 5744,3170 5744,3379.3 5825,3460.3 v1(5825,3515)
UD-: J1.2 U2.6 | length 1289.8
  Top Layer w8: U2.6 5315,3500 5324.76,3490.24 5324.76,3349.76 v1(5320,3345) ; J1.2 5801.58,3494.5 v1(5850,3446.08)
  Bottom Layer w8: v1(5320,3345) 5320,3295 5390,3225 5390,3160 5415,3135 5735,3135 5760,3160 5760,3372.67 5831.16,3443.84 5852.24,3443.84 v1(5850,3446.08)
VCC: C11.2 C12.2 C13.2 C14.2 C20.2 C21.2 C22.2 C24.2 C27.2 C32.1 C33.1 C36.2 F1.2 P2.2 R3.2 R4.2 R5.2 R9.2 R20.2 U1.4 U1.6 U1.18 U2.16 U4.2 U5.1 U11.17 U12.17 | length 9972.6
  Top Layer w8: U5.1 2180,3325 C27.2 2312.4,3250.2 R4.2 v1(2392.37,3235) 2392.37,3255.56 2503.82,3367 2526.18,3367 2613.18,3280 3019,3280 3019,3393.4 2987.4,3425 3012.4,3450 v1(3065,3450) ; v1(2460,3955) 2515,3955 2577.4,3892.6 R5.2 ; C21.2 3000,3750 3040,3710 3040,3581.03 3051,3570.03 3051,3544 v1(3070,3525) ; U1.6 3077.76,3532.76 v1(3070,3525) ; U1.4 3108.92,3595.75 3070,3556.82 v1(3070,3525) ; U1.18 3527.22,3501.26 3617.48,3411 3841,3411 v1(3850,3420) 3960,3310 v1(3960,3275) ; C24.2 4272.6,3377.6 v1(4290,3395) 4405,3395 v1(4430,3420) ; v1(4335,3615) 4610,3615 4625,3630 U4.2 ; v1(4440,3515) 4467,3542 4521.18,3542 4532.18,3531 4750,3531 4765,3546 4765,3595 4782,3612 4880.63,3612 4922.63,3570 v1(4940,3570) ; v1(4980,3625) 4980,3642.4 C36.2 5115.6,3778 5293,3778 5350,3835 v1(5350,3880) ; R9.2 5412.6,3337.6 5430,3355 5540,3355 R20.2@5582.6,3312.4 ; U2.16 5520,3750 ; v1(5485,3885) 5505,3865 R3.2 ; R3.2@5543.79,3861.19 5543.79,3773.79 5520,3750 ; R20.2 R20.2@5582.6,3312.4 ; 5520,3750 5535,3735 5535,3640 5560,3615 C32.1 5577.6,3587.6 5577.6,3395 C33.1 R20.2@5582.6,3312.4
  Bottom Layer w8: v1(2460,3955) 2445,3940 2445,3635 C13.2 2400,3462.6 C14.2 2397.4,3240.03 v1(2392.37,3235) 2392.37,3122.63 2445,3070 3810,3070 3960,3220 v1(3960,3275) ; v1(3070,3525) 3070,3445 3065,3440 3123.18,3440 3142,3421.18 3142,3388.82 3126.18,3373 3125,3373 U12.17 ; v1(3850,3420) 4265,3420 4267.4,3417.6 ; v1(4290,3395) 4267.4,3417.6 ; v1(4335,3615) 4310,3615 C11.2 4275,3472.6 C12.2 4267.4,3417.6 ; v1(4430,3420) 4430,3505 v1(4440,3515) ; v1(4980,3625) 4960,3605 4960,3590 v1(4940,3570) 4948,3562 5003,3562 5030,3535 U11.17 ; v1(5350,3880) 5480,3880 v1(5485,3885) 5504,3904 5624,3904 5685,3965 5685,4040 5720,4075 5825,4075 5855,4045 P2.2@5855,4030
pads on no net: BAT.0 J1.4 J1.6 J1.7 J1.8 J1.9 U1.12 U1.14 U1.19 U1.22 U1.24 U2.9 U2.10 U2.11 U2.12 U2.14 U2.15 U4.1 U11.1 U11.2 U11.3 U11.4 U11.5 U11.16 U12.1 U12.2 U12.3 U12.4 U12.5 U12.16 U13.1 U13.12 U13.17 U13.18 U14.1 U14.12 U14.17 U14.18

## Polygon pours and split planes (outlines as drawn)
GND on Top Layer "Top Layer-GND" (solid, pour order 4): 2000,3000 5937.01,3000 5937.01,4125.98 2000,4125.98
GND on Bottom Layer "Bottom Layer-GND" (solid, pour order 6): 2000,3000 5937.01,3000 5937.01,4125.98 2000,4125.98

## Keep-outs
Keep-Out Layer:
  lines w11.81: 2000,3005 2000,4130 5935,4130 5935,3005 2000,3005

## Silkscreen, mask and mechanical layers (free items; w line width, h text height)
Top Overlay:
  text "K1" at 2030,4050 h80
  text "K2" at 2030,3870 h80
  text "SCLK" at 5730,3850 h40
  text "MOSI" at 5835,3845 h40
  text "K3" at 2030,3700 h80
  text "RST" at 5442,3097 h80
  text "https://github.com/solosky/miniclock" at 2845,3030 h80
  text "Designed By solosky 2016.10" at 4715,3025 h80
  text "Mini CLOCK" at 4235,3015 h140

## Text inside footprints (layer, text, board x,y; h text height)
P2: Top Overlay "GND" at 5835,3710 h50; Top Overlay "RESET" at 5700,3710 h50; Top Overlay "VCC" at 5840,4075 h50; Top Overlay "MISO" at 5720,4075 h50
U13: Bottom Overlay "22" at 5356,4052 h60; Bottom Overlay "12" at 4343,4050 h60; Bottom Overlay "11" at 4328.74,3083.39 h60 r180; Bottom Overlay "1" at 5336.61,3079.45 h60 r180
U14: Bottom Overlay "22" at 3594,4052 h60; Bottom Overlay "12" at 2582,4051 h60; Bottom Overlay "11" at 2567.13,3083.39 h60 r180; Bottom Overlay "1" at 3575,3079.45 h60 r180